# Altium PCB Main.PcbDoc
Units mm, origin at the board's own origin, x right, y up, seen from the top; angles counter-clockwise.
Board outline 56.94 x 65.73 mm, 2 copper layers (Top Layer, Bottom Layer); 32 components, 21 nets, 124 pads, 6 vias.
Unrouted connection lines stored in the file: 25.
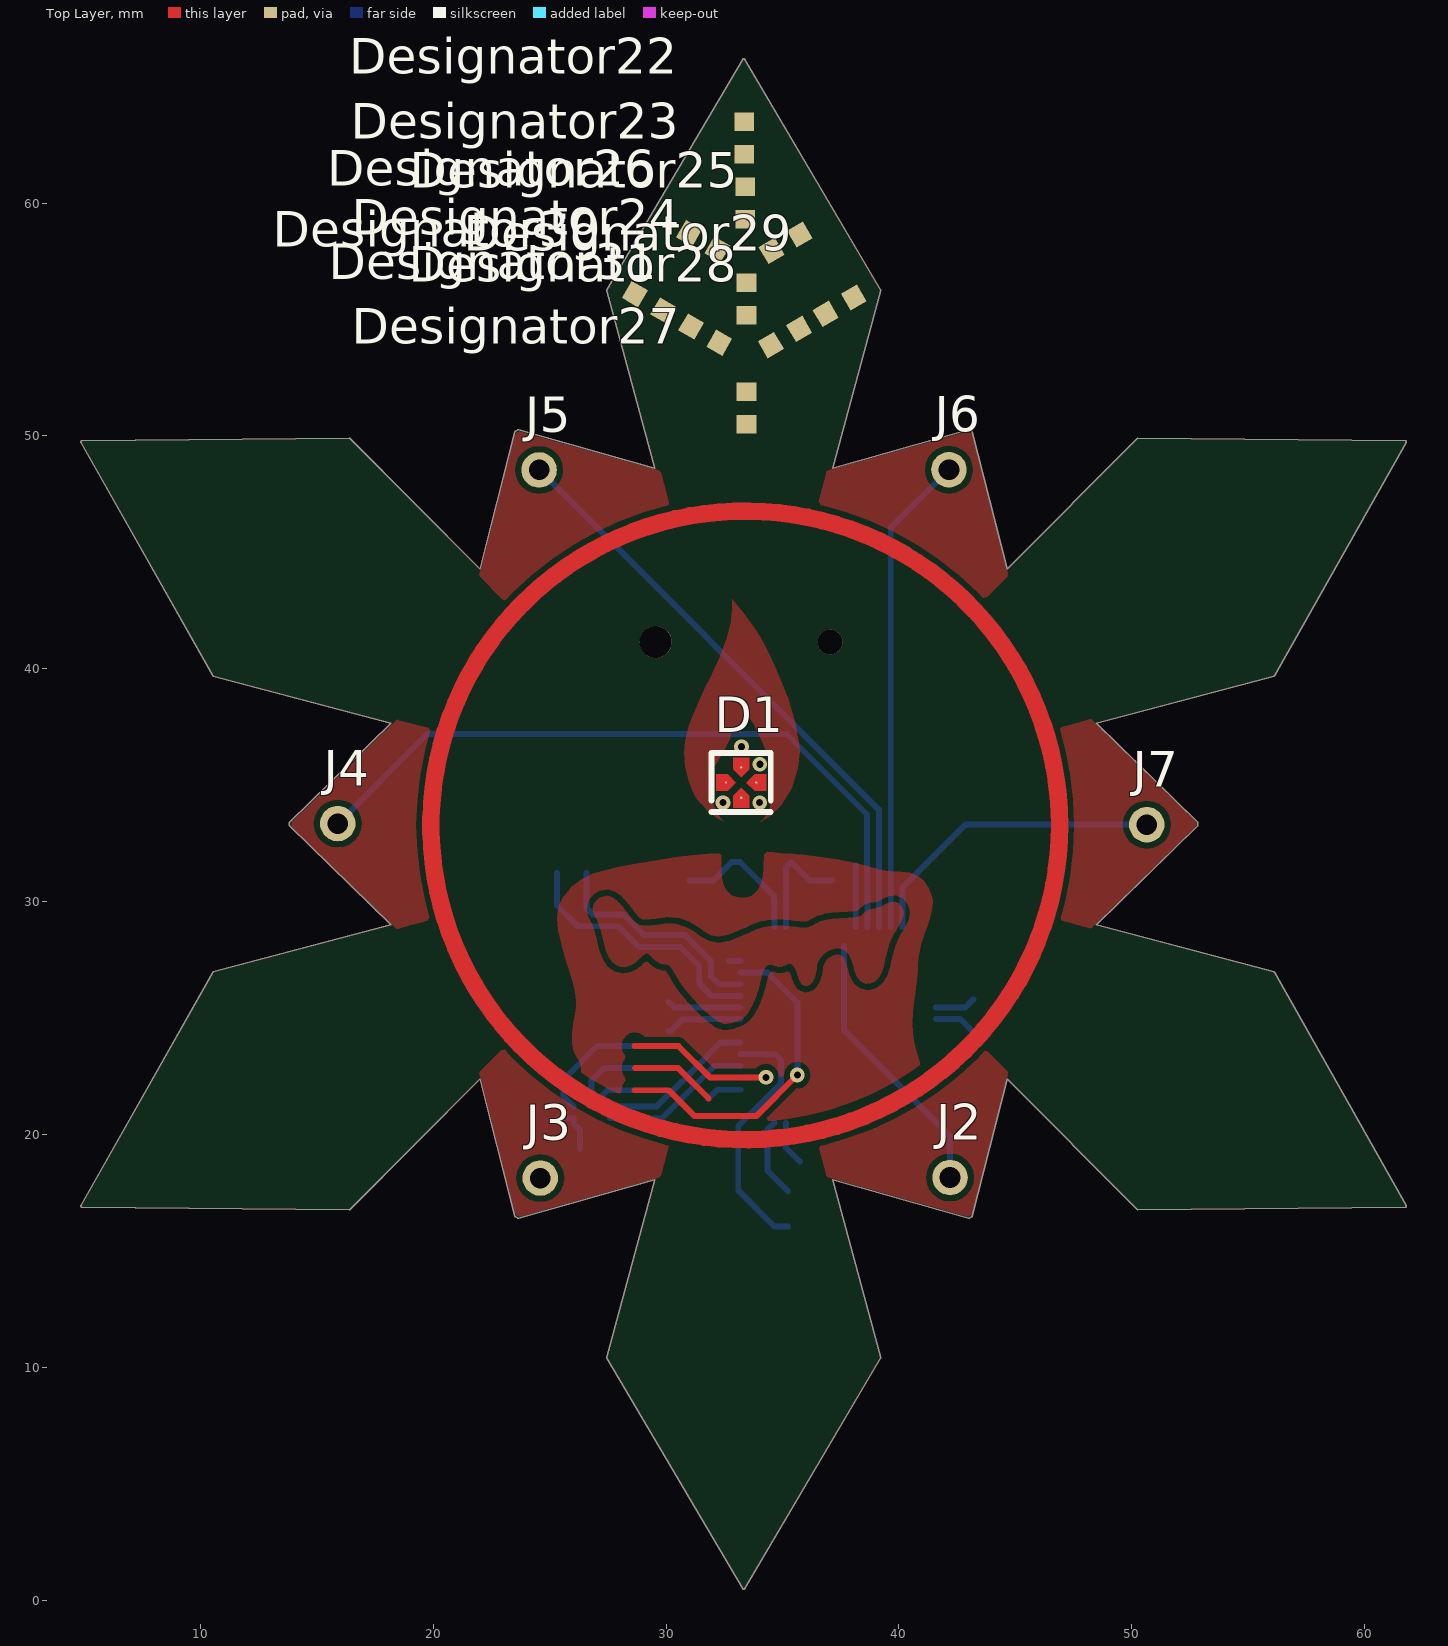
[diagram p0: Top Layer view]
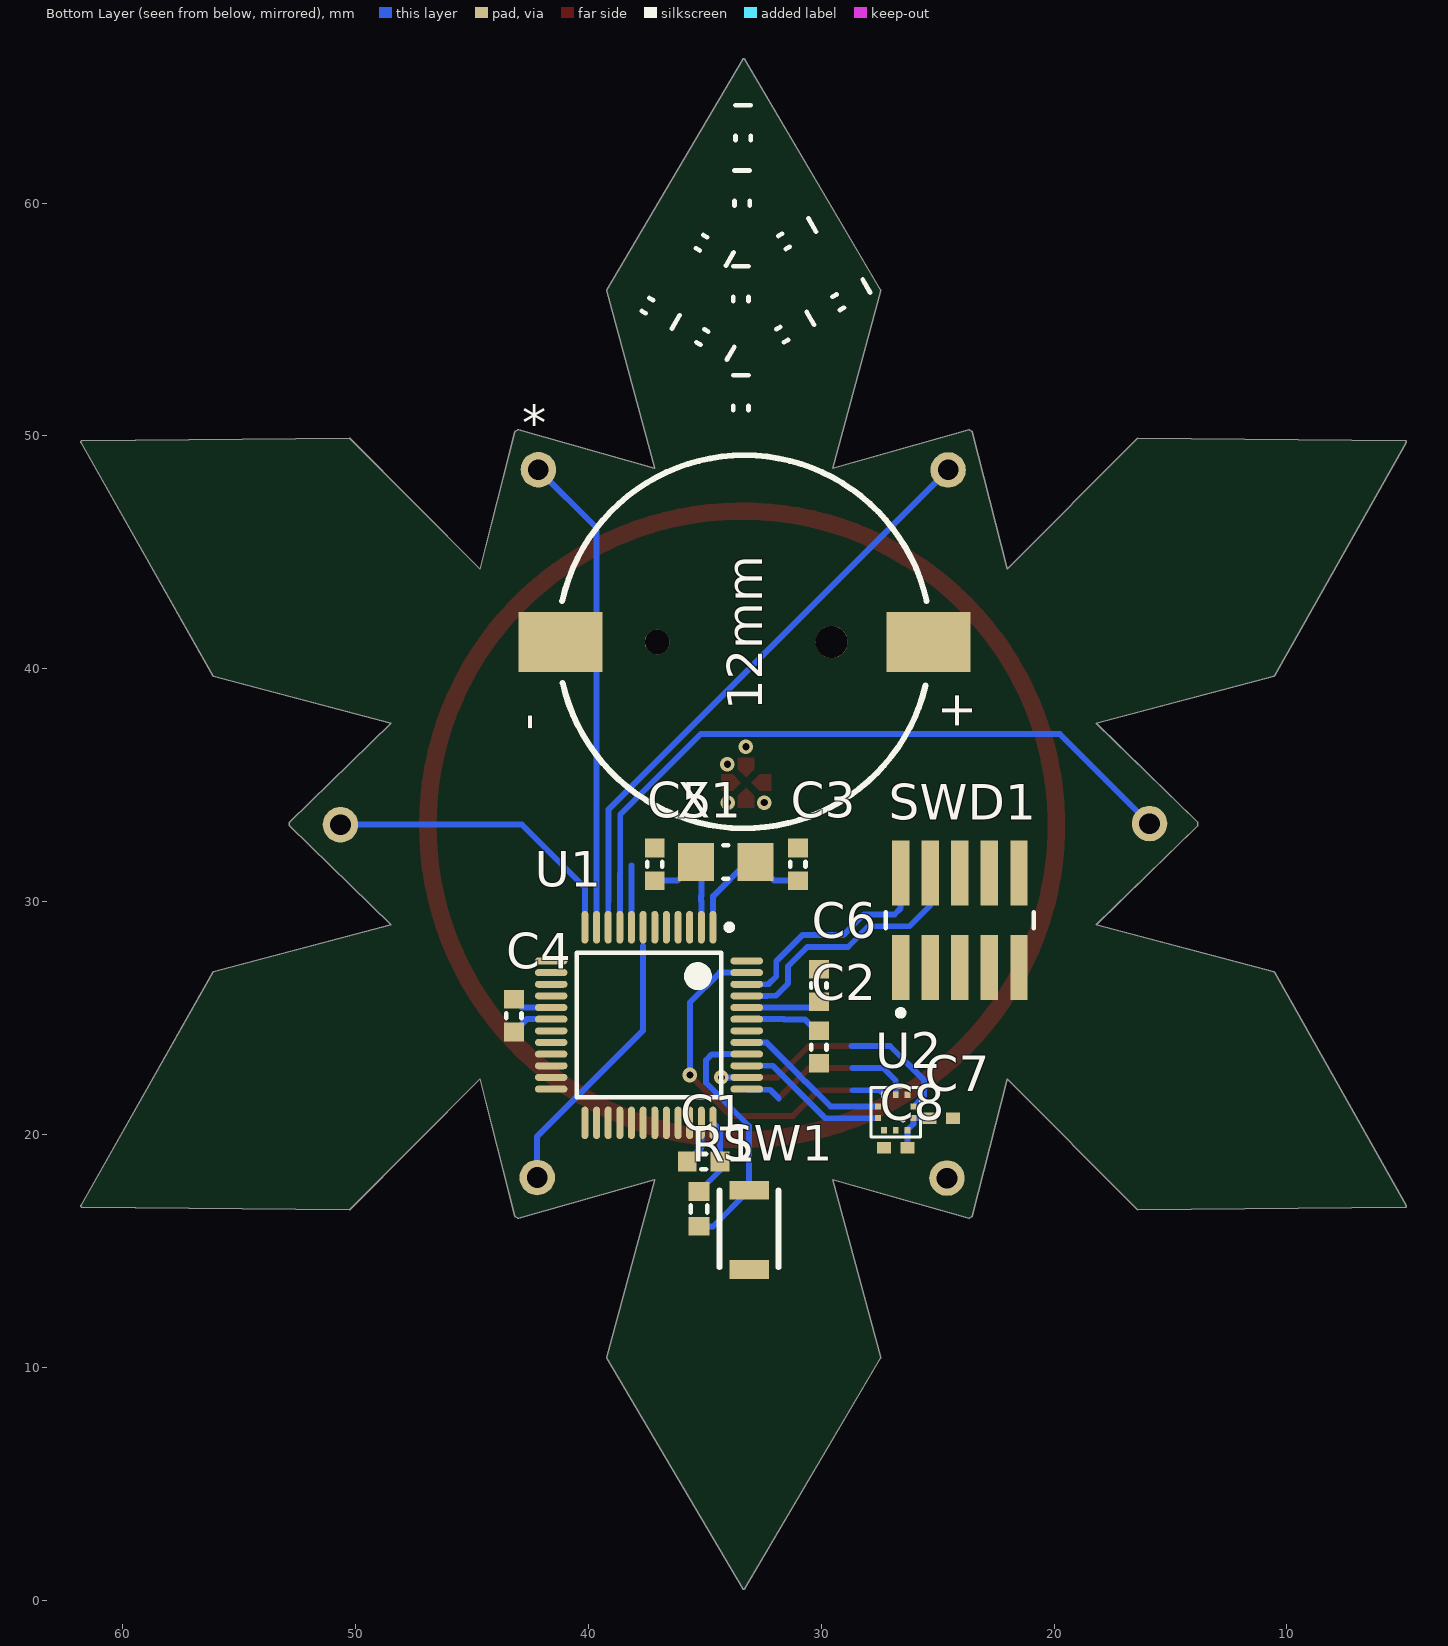
[diagram p1: Bottom Layer view, seen from below]
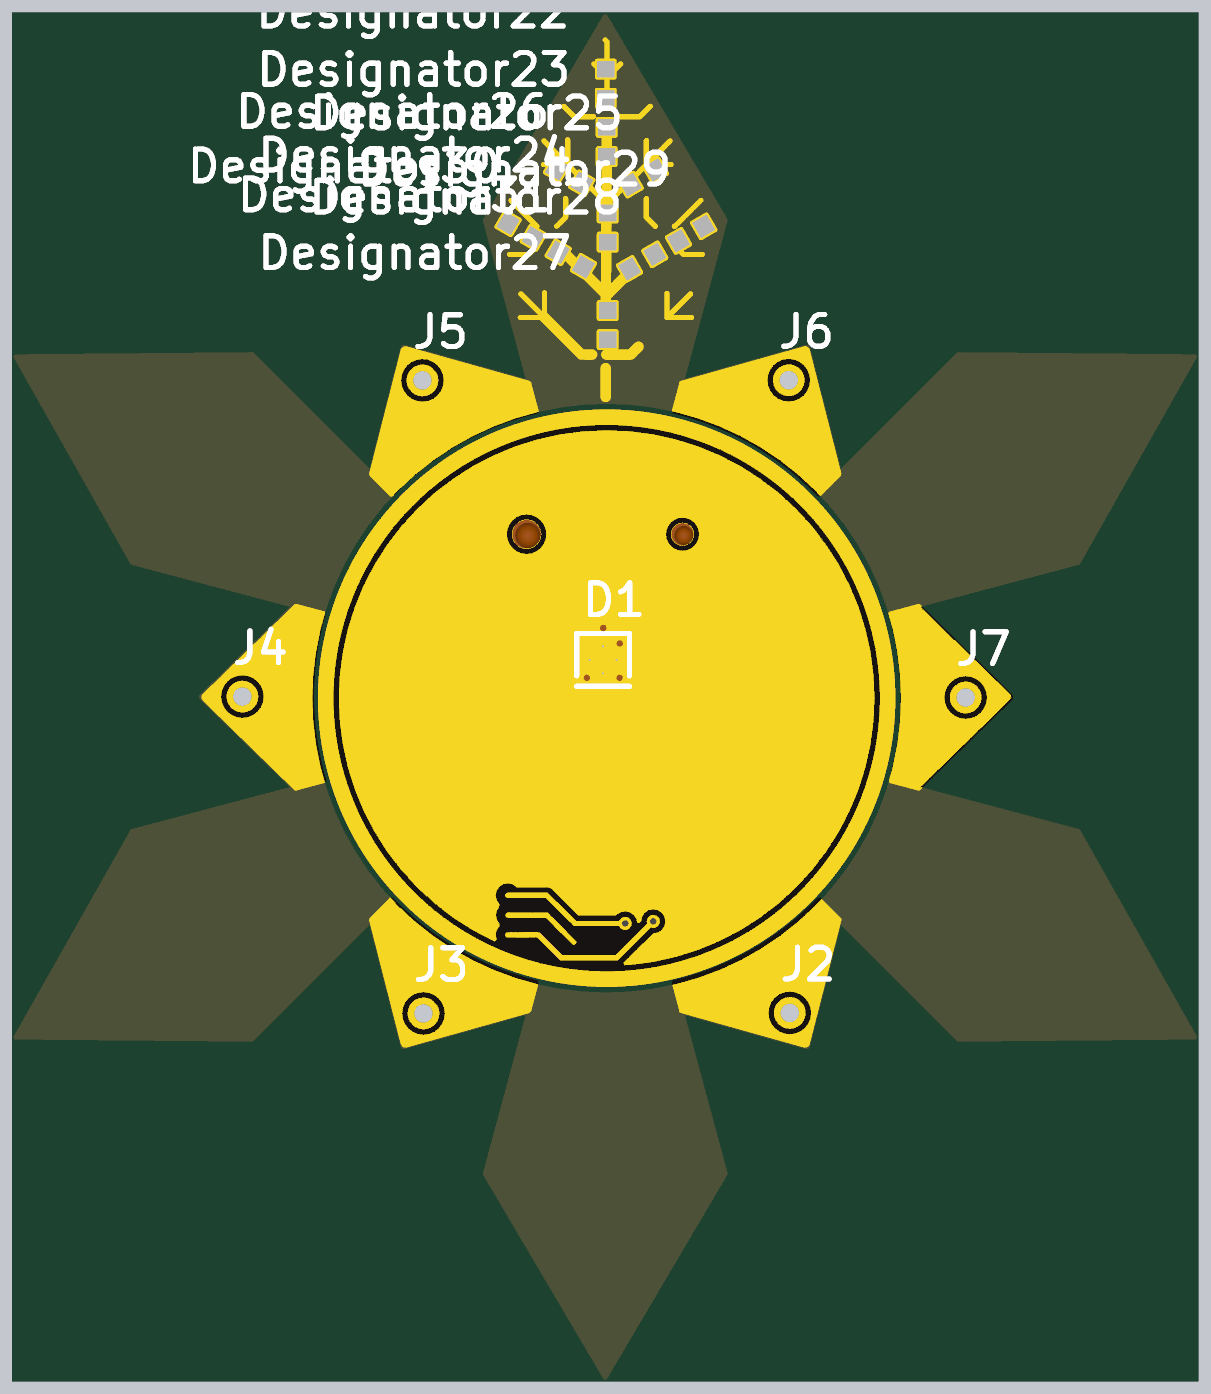
[diagram p2: 3D render of the assembled board from above, using the file's embedded part models]
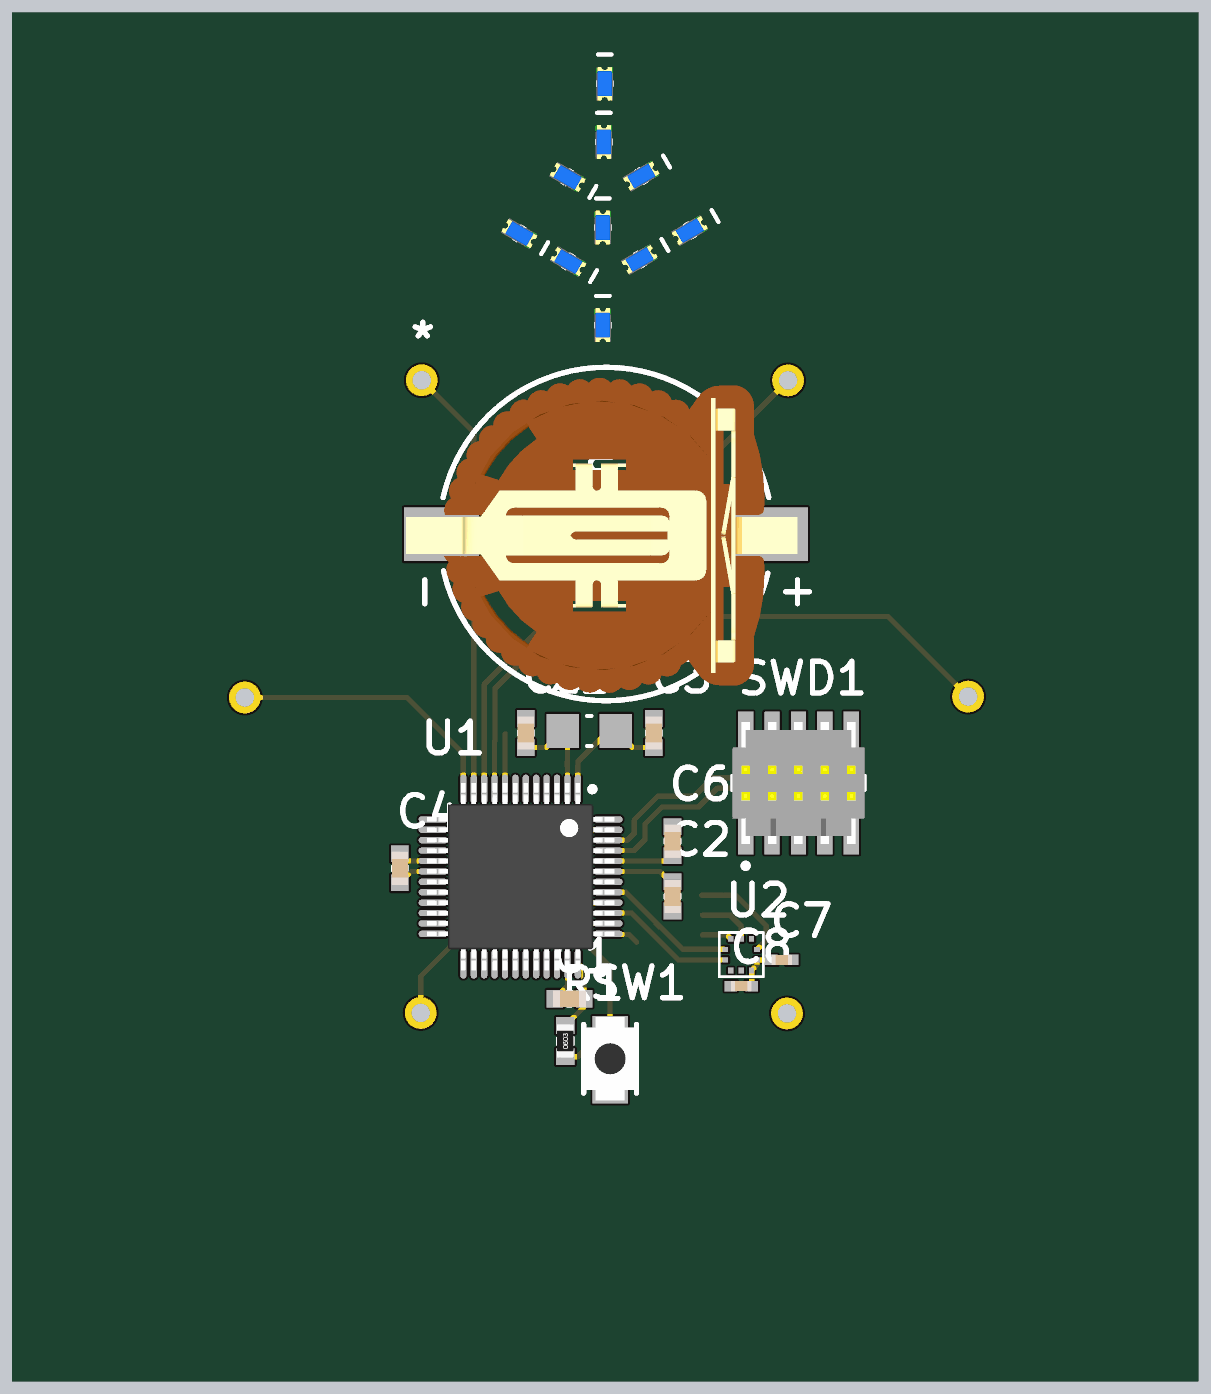
[diagram p3: 3D render of the assembled board from below, using the file's embedded part models]

## Layer stack, top to bottom
Top Solder: solder mask 0.0102, Solder Resist, Dk 3.5
Top Layer: signal copper 0.0356
Dielectric 1: dielectric 0.32, FR-4, Dk 4.8
Bottom Layer: signal copper 0.0356
Bottom Solder: solder mask 0.0102, Solder Resist, Dk 3.5

## Board outline
4.917,16.875 16.403,16.77 ccw(c16.404,16.823) 16.403,16.77 ccw(c16.404,16.823) 16.441,16.786 22.01,22.379 23.512,16.493 ccw(c23.563,16.506) 23.537,16.461 23.62,16.413 ccw(c23.646,16.458) 23.66,16.408 29.509,18.05 27.449,10.43 ccw(c27.5,10.417) 27.455,10.39 33.288,0.494 ccw(c33.333,0.521) 33.378,0.494 39.212,10.39 ccw(c39.167,10.417) 39.219,10.417 ccw(c39.167,10.417) 39.217,10.43 37.158,18.05 43.006,16.408 ccw(c43.021,16.458) 43.047,16.413 43.13,16.461 ccw(c43.104,16.506) 43.13,16.461 ccw(c43.104,16.506) 43.155,16.493 44.657,22.379 50.226,16.786 ccw(c50.263,16.823) 50.264,16.77 61.75,16.875 ccw(c61.75,16.927) 61.75,16.875 ccw(c61.75,16.927) 61.802,16.927 ccw(c61.75,16.927) 61.795,16.953 56.142,26.953 ccw(c56.096,26.927) 56.11,26.978 48.482,29.004 52.828,33.248 ccw(c52.791,33.286) 52.844,33.286 52.844,33.381 ccw(c52.791,33.381) 52.828,33.419 48.482,37.663 56.11,39.689 ccw(c56.096,39.74) 56.142,39.714 61.795,49.714 ccw(c61.75,49.74) 61.802,49.74 ccw(c61.75,49.74) 61.75,49.792 ccw(c61.75,49.74) 61.75,49.792 50.264,49.896 ccw(c50.263,49.844) 50.263,49.896 50.264,49.896 ccw(c50.263,49.844) 50.226,49.881 44.657,44.288 43.155,50.174 ccw(c43.104,50.161) 43.13,50.206 43.047,50.254 ccw(c43.021,50.208) 43.006,50.259 43.007,50.259 43.006,50.259 37.158,48.617 39.217,56.236 ccw(c39.167,56.25) 39.219,56.25 ccw(c39.167,56.25) 39.212,56.277 33.378,66.172 ccw(c33.333,66.146) 33.288,66.172 27.455,56.277 ccw(c27.5,56.25) 27.449,56.236 29.509,48.617 23.66,50.259 ccw(c23.646,50.208) 23.62,50.254 ccw(c23.646,50.208) 23.619,50.254 23.62,50.254 23.619,50.254 23.537,50.206 23.536,50.206 cw(c23.563,50.161) 23.537,50.206 ccw(c23.563,50.161) 23.512,50.174 22.01,44.288 16.441,49.881 ccw(c16.404,49.844) 16.403,49.896 ccw(c16.404,49.844) 16.403,49.896 4.917,49.792 ccw(c4.917,49.74) 4.916,49.792 4.917,49.792 ccw(c4.917,49.74) 4.871,49.714 10.525,39.714 ccw(c10.57,39.74) 10.557,39.689 18.185,37.663 13.839,33.419 ccw(c13.875,33.381) 13.823,33.381 13.823,33.286 ccw(c13.875,33.286) 13.839,33.248 18.185,29.004 10.557,26.978 ccw(c10.57,26.927) 10.525,26.953 4.871,16.953 ccw(c4.917,16.927)

## Design rules (kind name [scope] priority, off if disabled: settings)
Clearance [All] p1: gap=0.254 ignorepadtopadclearanceinfootprint=FALSE except(0: Arc-Hole Track-Hole SMDPad-Hole THPad-Hole Via-Hole Fill-Hole Poly-Hole Region-Hole Text-Hole)
PolygonConnect [All] p1: connectstyle=Relief reliefconductorwidth=0.254 reliefentries=4 polygonreliefangle="90 Angle" airgapwidth=0.254
RoomDefinition Main [InComponentClass('Main')] p1: confinementstyle=ConfineIn formatcopy=TRUE lockcomponents=FALSE outline 62.992,1.905 81.28,1.905 81.28,15.24 62.992,15.24
RoutingVias [All] p1: holewidth=0.711 width=1.27 viastyle="Through Hole" minholewidth=0.711 minwidth=1.27 maxholewidth=0.711 maxwidth=1.27
SolderMaskExpansion [All] p1: expansion=0.102
Width [All] p1: maxlimit=0.254 minlimit=0.254 preferedwidth=0.254
30 further rules are at their usual default settings.

## Classes and differential pairs
component class Main: * C1 C2 C3 C4 C5 C6 C7 C8 D1 J2 J3 J4 J5 J6 J7 R1 SW1 SWD1 U1 U2 X1

## Components (designator, comment, footprint, x,y, rotation, side; value= is the part's Value field where it differs from the comment)
* "KEYSTONE_12MM_COIN_HOLDER_SMT" 12MM_COIN_CELL_SMT 33.3,41.15 r180 bottom
C1 "__template_cap" C0603 35.05,18.836 r180 bottom
C2 "__template_cap" C0603 30.1,23.75 r270 bottom
C3 "__template_cap" C0603 31,31.6 r270 bottom
C4 "__template_cap" C0603 43.2,25.1 r90 bottom
C5 "__template_cap" C0603 37.15,31.6 r270 bottom
C6 "__template_cap" C0603 30.1,26.4 r90 bottom
C7 "399-3520-1-ND" C0402 24.85,20.7 r180 bottom value=1e-07
C8 "399-3520-1-ND" C0402 26.8,19.436 r0 bottom value=1e-07
D1 "LED_CL-503T-SD-T" LED_RGB_CL-503T-SD-T 33.227,35.113 r0 top
Designator22 "Comment" LED_0603P_BLUE 33.358,62.8 r270 top
Designator23 "Comment" LED_0603P_BLUE 33.4,60 r270 top
Designator24 "Comment" LED_0603P_BLUE 33.45,55.885 r270 top
Designator25 "Comment" LED_0603P_BLUE 35.139,58.298 r30 top
Designator26 "Comment" LED_0603P_BLUE 31.6,58.357 r330 top
Designator27 "Comment" LED_0603P_BLUE 33.45,51.2 r270 top
Designator28 "Comment" LED_0603P_BLUE 35.107,54.25 r30 top
Designator29 "Comment" LED_0603P_BLUE 37.458,55.595 r30 top
Designator30 "Comment" LED_0603P_BLUE 29.271,55.74 r330 top
Designator31 "Comment" LED_0603P_BLUE 31.68,54.35 r330 top
J2 "CONN_1x1" CONN_1x1_100MIL 42.2,18.15 r0 top
J3 "CONN_1x1" CONN_1x1_100MIL 24.6,18.125 r0 top
J4 "CONN_1x1" CONN_1x1_100MIL 15.9,33.35 r0 top
J5 "CONN_1x1" CONN_1x1_100MIL 24.55,48.542 r0 top
J6 "CONN_1x1" CONN_1x1_100MIL 42.15,48.55 r0 top
J7 "CONN_1x1" CONN_1x1_100MIL 50.65,33.305 r0 top
R1 "__template_resistor" R0603 35.25,16.8 r90 bottom
SW1 "SWITCH_SPST-NO" SWITCH_B3U-1000P 33.1,17.6 r270 bottom
SWD1 "FTSH-105-01-F-DV-K" SMTC-FTSH-105-01-L-DV-K_V 24.05,29.2 r180 bottom
U1 "SAMD21G18A-A" "SAMD21 TQFP-48" 37.4,24.7 r270 bottom
U2 "BMP388" "8 pin LGA" 26.8,20.95 r270 bottom
X1 "XTAL_9HT10-32.768KEZF-T" XTAL_TXC_9HT10 34.1,31.7 r180 bottom

## Footprints (in the part's own frame and the unit in brackets; to place one, negate y for a bottom-side part, rotate by r counter-clockwise, add the part's x,y. Pads: shape width x height; smd on the part's side, far side on the other; paste and mask are expansions set on the pad)
"8 pin LGA" [mm]
  rect 0.25x0.275 smd: 1(0.25,0.763) 2(-0.25,0.763) 6(-0.25,-0.763) 7(0.25,-0.763)
  rect 0.275x0.25 smd: 3(-0.763,0.5) 4(-0.763,0) 5(-0.763,-0.5) 8(0.763,-0.5) 9(0.763,0) 10(0.763,0.5)
  silkscreen extent -1.06,-1.06 1.06,1.06, body extent -1,-1 1,1, height 0.75
12MM_COIN_CELL_SMT [mil]
  rect 142x102 smd: 0(311,0) 1(-311,0)
  round 42 hole 42.01: 13(-147.5,0)
  round 54 hole 54.02: 14(147.5,0)
  silkscreen extent -308,-315 308,316, body extent -378,-300 362,296, height 170
C0402 [mm] "Chip Capacitor, 2-Leads, Body 1.0x0.5mm, IPC High Density"
  rect 0.6x0.5 smd: 1(-0.5,0) 2(0.5,0)
  body extent -0.5,-0.25 0.5,0.25, height 0.5
C0603 [mm] "Chip Capacitor, 2-Leads, Body 1.6x0.8mm, IPC High Density"
  rect 0.8x0.85 smd: 1(-0.7,0) 2(0.7,0)
  silkscreen extent -0.1,-0.33 0.1,0.33, body extent -0.8,-0.4 0.8,0.4, height 0.8
CONN_1x1_100MIL [mil]
  round 60 hole 35: 1(0,0)
LED_0603P_BLUE [mm]
  rect 0.8x0.85 smd: 1(-0.7,0) 2(0.7,0)
  body extent -0.81,-0.4 0.81,0.4, height 0.6
LED_RGB_CL-503T-SD-T [mm]
  round 0.1 smd: 1(0.651,0) 2(0,-0.651) 3(-0.651,0) 4(0,0.651)
  Top Layer region: 1.076,0.35 0.576,0.35 0.226,0 0.576,-0.35 1.076,-0.35
  Top Layer region: -0.35,1.076 -0.35,0.576 0,0.226 0.35,0.576 0.35,1.076
  Top Layer region: -1.076,-0.35 -0.576,-0.35 -0.226,0 -0.576,0.35 -1.076,0.35
  Top Layer region: 0.35,-1.076 0.35,-0.576 0,-0.226 -0.35,-0.576 -0.35,-1.076
  silkscreen extent -1.27,-1.27 1.27,1.27, body extent -0.65,-0.76 0.65,0.76, height 0.35
R0603 [mm] "Chip Resistor, 2-Leads, Body 1.6x0.8mm, IPC High Density"
  rect 0.8x0.9 smd: 1(-0.75,0) 2(0.75,0)
  silkscreen extent -0.15,-0.35 0.15,0.35, body extent -0.8,-0.4 0.8,0.4, height 0.45
"SAMD21 TQFP-48" [mm] "TQFP-48, Body 7.00x7.00mm, Pitch 0.50mm, IPC Medium Density"
  oval 1.4x0.3 smd: 1(-4.2,2.75) 2(-4.2,2.25) 3(-4.2,1.75) 4(-4.2,1.25) 5(-4.2,0.75) 6(-4.2,0.25) 7(-4.2,-0.25) 8(-4.2,-0.75) 9(-4.2,-1.25) 10(-4.2,-1.75) 11(-4.2,-2.25) 12(-4.2,-2.75) 25(4.2,-2.75) 26(4.2,-2.25) 27(4.2,-1.75) 28(4.2,-1.25) 29(4.2,-0.75) 30(4.2,-0.25) 31(4.2,0.25) 32(4.2,0.75) 33(4.2,1.25) 34(4.2,1.75) 35(4.2,2.25) 36(4.2,2.75)
  oval 0.3x1.4 smd: 13(-2.75,-4.2) 14(-2.25,-4.2) 15(-1.75,-4.2) 16(-1.25,-4.2) 17(-0.75,-4.2) 18(-0.25,-4.2) 19(0.25,-4.2) 20(0.75,-4.2) 21(1.25,-4.2) 22(1.75,-4.2) 23(2.25,-4.2) 24(2.75,-4.2) 37(2.75,4.2) 38(2.25,4.2) 39(1.75,4.2) 40(1.25,4.2) 41(0.75,4.2) 42(0.25,4.2) 43(-0.25,4.2) 44(-0.75,4.2) 45(-1.25,4.2) 46(-1.75,4.2) 47(-2.25,4.2) 48(-2.75,4.2)
  silkscreen extent -4.32,-3.1 3.1,3.57, body extent -4.5,-4.5 4.5,4.5, height 1.2
SMTC-FTSH-105-01-L-DV-K_V [mm] "CONN, 10-Leads, Body 6.35x3.43mm, Pitch 1.27mm"
  rect 0.74x2.79 smd: 1(-2.54,-2.035) 2(-2.54,2.035) 3(-1.27,-2.035) 4(-1.27,2.035) 5(0,-2.035) 6(0,2.035) 7(1.27,-2.035) 8(1.27,2.035) 9(2.54,-2.035) 10(2.54,2.035)
  silkscreen extent -3.17,-4.1 3.17,0.34, body extent -3.17,-2.92 3.18,2.92, height 6.12
SWITCH_B3U-1000P [mm]
  rect 0.8x1.7 smd: 1(0,0) 2(3.4,0)
  silkscreen extent 0,-1.27 3.3,1.27, body extent -0.35,-1.25 3.65,1.25, height 1.6
XTAL_TXC_9HT10 [mm] "Chip Capacitor, 2-Leads, Body 3.2x1.5mm, IPC Medium Density"
  rect 1.55x1.65 smd: 1(-1.275,0) 2(1.275,0)
  silkscreen extent -0.1,-0.72 0.1,0.72, body extent -1.65,-0.8 1.65,0.8, height 0.85

## Part data
*: Manufacturer="Keystone Electronics", Manufacturer Part Number=1056TR, Operating Temperature=-, Supplier Part Number 1=36-1056DKR-ND, Battery Cell Size="Coin, 12.5mm", Battery Series=1220, Battery Type, Function="Coin Cell, Holder", Category="Battery Products", ComponentLink1Description=http://www.keyelco.com/product-pdf.cfm?p=715, ComponentLink1URL=http://www.keyelco.com/product-pdf.cfm?p=715, Height Above Board="0.157\" (4.00mm)", Mounting Type="PCB, Surface Mount", Number of Cells=1, Part Status=Active, Pricing 1="1=2.28, 10=2.071, 50=1.8598, 100=1.7752, 250=1.60616 (USD)", RoHS="RoHS Compliant", Stock 1=1443, Style="Holder (Open)", Supplier 1=Digi-Key, Termination Style="SMD (SMT) Tab"
C1 C4 C6: library part "CAP CER 0603 0.1µF X7R 50V 10%", Capacitance (shorthand)=0.1µF, Capacitance - pF (Machine readable)=100000, Dielectric=X7R, Manufacturer="Murata Electronics North America", Supplier Part Number 1=478-5052-1-ND, Supplier 1=Digikey, Supplier 2=Digi-Key, Supplier Part Number 2=490-8020-1-ND, type=capacitor
C2: library part "CAP CER 0603 1µF X7R 16V 10%", Capacitance (shorthand)=1µF, Capacitance - pF (Machine readable)=1000000, Dielectric=X7R, Manufacturer="Murata Electronics North America", Supplier Part Number 1=490-10479-1-ND, Supplier 1=Digi-Key, type=Capacitor
C3 C5: library part "CAP CER 22PF 50V C0G/NP0 0603", Capacitance (shorthand)=22pF, Supplier Part Number 1=478-5771-1-ND, Supplier 1=Digi-Key
C7 C8: human_value=100n, package=0402, tolerance=10%, voltage=10.0, price=0.06, Supplier Part Number 1=399-3520-1-ND, type=capacitor
D1: "RGB LOW VOLTAGE RICOLOR TOP FIRING 1.5 X 1.3 X", Color="Red, Green, Blue (RGB)", Current - Test="5mA Red, 5mA Green, 5mA Blue", Lens Color=-, Manufacturer=Citizen, Manufacturer Part Number=CL-503T-SD-T, Millicandela Rating="36mcd Red, 180mcd Green, 40mcd Blue", Package / Case="4-SMD, No Lead", Supplier Part Number 1=1642-1509-2-ND, Voltage - Forward (Vf) (Typ)="1.85V Red, 2.7V Green, 2.75V Blue", Category=Optoelectronics, ComponentLink1Description=http://ce.citizen.co.jp/up_img/product/KF9Gun57LXzH/CL-503_e.pdf, ComponentLink1URL=http://ce.citizen.co.jp/up_img/product/KF9Gun57LXzH/CL-503_e.pdf, Configuration="Common Anode", Features=-, Height (Max)=0.35mm, Lens Style/Size="Rectangle with Flat Top, 1.30mm x 1.50mm", Lens Transparency=-, Mounting Type="Surface Mount", Packaging="Tape & Reel (TR)", Part Status=Active, Pricing 1="5000=0.2318, 10000=0.22836, 25000=0.22321 (USD)", RoHS="RoHS Compliant", Size / Dimension="1.50mm L x 1.30mm W", Stock 1=15000, Supplier 1=Digi-Key, Supplier Device Package=-, Viewing Angle=-, Wavelength - Dominant=-, Wavelength - Peak="618nm Red, 530nm Green, 470nm Blue"
J2 J3 J4 J5 J6 J7: "Just a hole, lol"
R1: library part "RES SMD 10K OHM 1% 1/10W 0603", Manufacturer=Yageo, Manufacturer Part Number=RC0603FR-0710KL, Operating Temperature="-55°C ~ 155°C", Power (Watts)="0.1W, 1/10W", Resistance="10 k?", Resistance (Sortable)=10000, Supplier Part Number 1=541-1784-1-ND, Temperature Coefficient=±100ppm/°C, tolerance=±1%, Datasheets=http://www.yageo.com/documents/recent/PYu-RC_Group_51_RoHS_L_9.pdf, Image=//media.digikey.com/Renders/Yageo%20Renders/0603-(1608-Metric).jpg, Supplier 1=Digikey
SW1: "SWITCH TACTILE SPST-NO 0.05A 12V", Contact Rating @ Voltage="0.05A @ 12VDC", Illumination Type, Color=-, Manufacturer="Omron Electronics Inc-EMC Div", Manufacturer Part Number=B3U-1000P, Operating Force=153gf, Operating Temperature="-25°C ~ 70°C", Supplier Part Number 1=SW1020CT-ND, Actuator Height off PCB, from Pins=1.60mm, Actuator Material=-, Actuator Orientation="Top Actuated", Actuator Type=Standard, Category=Switches, Circuit=SPST-NO, ComponentLink1Description=http://components.omron.com/components/web/pdflib.nsf/0/2DD3893C7DD33E9E862572900079E9D6/$file/B3U_1110.pdf, ComponentLink1URL=http://components.omron.com/components/web/pdflib.nsf/0/2DD3893C7DD33E9E862572900079E9D6/$file/B3U_1110.pdf, Features=-, Illumination=Non-Illuminated, Illumination Voltage (Nominal)=-, Ingress Protection="Dust Proof", Mechanical Life="200,000 Cycles", Mounting Type="Surface Mount", Outline="3.00mm x 2.50mm", Packaging="Cut Tape (CT)", Pricing 1="1=1.25, 10=1.201, 25=1.1332, 50=0.997, 100=0.9064, 250=0.86108, 500=0.83842, 1000=0.65714 (USD)", RoHS="RoHS Compliant", Stock 1=16437, Supplier 1=Digi-Key, Switch Function=Off-Mom, Switch Travel=0.15mm, Termination Style="SMD (SMT) Tab"
SWD1: library part FTSH-105-01-L-DV-K, "Male Header, Pitch 1.27 mm, 2 x 5 Position, Height 6.12 mm, RoHS, Tube", Color=Black, Manufacturer=Samtec, Package Description="Male Header, Pitch 1.27 mm, 2 x 5 Position, Height 5.97 mm, Tail Length 4.32 mm", Supplier Part Number 1=SAM8796-ND, Category=Connectors,Interconnects, Connector Type=Header,Shrouded, Contact Finish=Gold, Contact Finish Thickness=3µin(0.08µm), Contact Mating Length="0.120\"(3.05mm)", Contact Type=MalePin, Datasheet URL=http://suddendocs.samtec.com/prints/ftsh-1xx-xx-xxx-dv-xxx-mkt.pdf, Datasheet Version="Rev. ET, 10/1995", Family=RectangularConnectors-Headers,MalePins, Fastening Type=-, Features=-, Manufacturer URL=http://www.samtec.com/, Mounting Type=SurfaceMount, Number of Positions=10, Number of Positions Loaded=All, Number of Rows=2, Package Reference=FTSH-105-01-L-DV-K, Package URL=http://suddendocs.samtec.com/prints/ftsh-1xx-xx-xxx-dv-xxx-footprint.pdf, Packaging=Tube, Pitch="0.050\"(1.27mm)", Row Spacing="0.050\"(1.27mm)", Series=FTSH, Supplier 1=Digi-Key, Supplier 2=Digi-Key, Supplier 3=Samtec, Supplier Part Number 2=FTSH-105-01-F-DV-K-ND, Supplier Part Number 3=FTSH-105-01-F-DV-K, Termination=Solder
U1: "48Mhz Atmel SAM ARM Cortex M0+", Supplier Part Number 1=ATSAMD21G18A-AU-ND, ComponentLink1Description="Product Page", ComponentLink1URL=https://www.microchip.com/wwwproducts/en/ATSAMD21G18, ComponentLink2Description=Datasheet, ComponentLink2URL=http://ww1.microchip.com/downloads/en/DeviceDoc/SAM-D21-Family-Datasheet-DS40001882C.pdf, Supplier 1=Digi-Key
U2: "Pressure Sensor 4.35 PSI ~ 18.13 PSI (30 kPa ~ 125 kPa) Absolute 10-WFLGA", Manufacturer="Bosch Sensortec", Supplier Part Number 1=828-1079-1-ND, ComponentLink1Description=https://ae-bst.resource.bosch.com/media/_tech/media/product_flyer/BST-BMP388-FL000-00.pdf, ComponentLink1URL=https://ae-bst.resource.bosch.com/media/_tech/media/product_flyer/BST-BMP388-FL000-00.pdf, Manufacturer Part Number=BMP388, Pricing 1="1=3.93, 5=3.466, 10=3.061, 25=2.4832, 50=2.1946, 100=2.1368, 500=1.7903, 1000=1.6748, 5000=1.5593 (USD)", Stock 1=46050, Supplier 1=Digi-Key
X1: "CRYSTAL 32.768 KHZ 12.5 PF SMD", ESR (Equivalent Series Resistance)="70 kOhm", Frequency=32.768kHz, Frequency Stability=-, Frequency Tolerance=±10ppm, Load Capacitance=12.5pF, Manufacturer="TXC CORPORATION", Manufacturer Part Number=9HT10-32.768KEZF-T, Operating Mode=Fundamental, Operating Temperature="-40°C ~ 85°C", Package / Case=2-SMD, Supplier Part Number 1=887-1507-1-ND, Category="Crystals and Oscillators", ComponentLink1Description=Datasheet, ComponentLink1URL=http://www.txccrystal.com/images/pdf/9ht10.pdf, Height="0.033\" (0.85mm)", Mounting Type="Surface Mount", Packaging="Cut Tape (CT)", Pricing 1="1=1.88, 10=1.625, 50=1.425, 100=1.125, 500=0.95, 1000=0.75 (USD)", Ratings=-, RoHS="RoHS Compliant", Size / Dimension="0.126\" L x 0.059\" W (3.20mm x 1.50mm)", Stock 1=5250, Supplier 1=Digi-Key, type="kHz Crystal (Tuning Fork)"

## Via types
v1: diameter 0.63, hole 0.305, Top Layer to Bottom Layer, tented both sides, 6 vias

## Nets (pads, with @x,y where several pads share a name; then routed paths per layer and width w, separated by ;. In a path a pad name is that pad's centre, name@x,y a point inside that pad or via, vN(x,y) a via of type N, cw(c..) or ccw(c..) an arc to the next point about the centre after c; other vN are vias at no path point)
+3.3: *.1 C1.2 C4.2 C6.1 C7.1 C8.1 R1.2 U1.17 U1.36 U1.44 U2.1 U2.10 | length 10.5
  Bottom Layer w0.254: C7.1 25.35,20.694 U2.1@26.037,20.694 ; U2.1 U2.1@26.037,20.694 ; C8.1@26.3,19.4 U2.10 26.037,20.45 U2.1@26.037,20.694 ; C6.1 30.35,25.45 32.25,25.45 U1.44 ; U1.36 34.35,20.2 C1.2 34.35,18.45 R1.2 ; U1.17 42.85,25.45 C4.2
BMP388-Int: U1.39 U2.7 | length 6.5
  Bottom Layer w0.254: U2.7@27.595,20.694 29.826,20.694 32.082,22.95 U1.39
BMP388-Select: U1.41 U2.6 | length 6.7
  Bottom Layer w0.254: U2.6@27.595,21.206 29.606,21.206 30.669,22.269 30.683,22.269 30.906,22.492 30.906,22.506 32.342,23.942 32.35,23.942 ; 32.35,23.95 U1.41
GND: *.0 C1.1 C2.2 C3.1 C4.1 C5.1 C6.2 C7.2 C8.2 SW1.2 SWD1.3 SWD1.5 SWD1.9 U1.18 U1.35 U1.42 U2.3 U2.8 U2.9 | length 3.8
  Bottom Layer w0.254: U1.35 35.15,19.474 35.131,19.455 C1.1 ; U1.18 42.65,24.95 C4.1
MISO: U1.47 U2.5 | length 15.7
  Top Layer w0.254: 28.65,21.9 30.115,21.9 31.215,20.8 33.891,20.8 v1(35.641,22.55)
  Bottom Layer w0.254: U2.5 27.487,21.9 28.65,21.9 ; U1.47 34.362,26.95 35.641,25.671 v1(35.641,22.55)
MOSI: U1.37 U2.4 | length 7.9
  Top Layer w0.254: 28.663,22.85 30.526,22.85 31.826,21.55
  Bottom Layer w0.254: U2.4 26.8,22.32 27.33,22.85 28.663,22.85 ; 31.826,21.55 32.195,21.919 U1.37@33.2,21.919
NetC3_2: C3.2 U1.1 X1.2 | length 5.9
  Bottom Layer w0.254: C3.2 32.025,30.9 X1.2 33.175,31.7 34.642,30.233 34.642,30.025 ; U1.1 34.65,30.025
NetC5_2: C5.2 U1.2 X1.1 | length 5
  Bottom Layer w0.254: U1.2 35.15,30.025 ; 35.158,30.025 35.158,30.235 35.15,30.243 35.15,31.475 X1.1 36.175,30.9 C5.2
NetR1_1: R1.1 SW1.1 U1.40 | length 11
  Bottom Layer w0.254: U1.40 34.3,23.45 ; 34.25,23.442 34.698,23.442 34.945,23.194 34.945,22.207 33.1,20.362 SW1.1 34.65,16.05 R1.1
RST: SWD1.10
SCK: U1.38 U2.2 | length 12.3
  Top Layer w0.254: 28.65,23.8 30.53,23.8 31.88,22.45 v1(34.29,22.45)
  Bottom Layer w0.254: U2.2 25.594,21.643 25.594,22.344 27.05,23.8 28.65,23.8 28.7,23.8 ; U1.38 v1(34.29,22.45)
SWCLK: SWD1.4 U1.45 | length 11.3
  Bottom Layer w0.254: SWD1.4 25.32,29.83 26.209,28.941 27.958,28.941 28.849,28.05 30.6,28.05 31.425,27.225 31.425,26.475 31.942,25.958 32.33,25.958 ; 32.33,25.95 U1.45
SWDIO: SWD1.2 U1.46 | length 9.9
  Bottom Layer w0.254: SWD1.2 26.59,29.71 26.851,29.449 28.168,29.449 29.059,28.558 30.81,28.558 31.933,27.435 31.933,26.785 32.252,26.466 32.268,26.466 ; 32.268,26.45 U1.46
Touch-1: J2.1 U1.7 | length 11.8
  Bottom Layer w0.254: 37.65,28.099 37.65,24.47 42.2,19.92 J2.1
Touch-2: J3.1 U1.8 | length 2.6
  Bottom Layer w0.254: U1.8 38.15,31.55
Touch-3: J4.1 U1.9 | length 30.6
  Bottom Layer w0.254: J4.1 19.75,37.2 35.173,37.2 38.634,33.739 38.634,31.2 ; U1.9 38.65,31.2
Touch-4: J5.1 U1.10 | length 25.7
  Bottom Layer w0.254: J5.1 39.142,33.95 39.142,30.025 ; 39.142,30.017 39.142,30.025 ; U1.10 39.15,30.017 39.142,30.025
Touch-5: J6.1 U1.11 | length 20.7
  Bottom Layer w0.254: U1.11 39.65,46.05 J6.1
Touch-6: J7.1 U1.12 | length 13.3
  Bottom Layer w0.254: U1.12 40.15,30.6 42.855,33.305 J7.1
VCC: SWD1.1
VDDCORE: C2.1 U1.43 | length 3.3
  Bottom Layer w0.254: C2.1 30.214,24.45 30.706,24.942 31.6,24.942 ; 31.6,24.95 U1.43
pads on no net: *.13 *.14 D1.1 D1.2 D1.3 D1.4 Designator22.1 Designator22.2 Designator23.1 Designator23.2 Designator24.1 Designator24.2 Designator25.1 Designator25.2 Designator26.1 Designator26.2 Designator27.1 Designator27.2 Designator28.1 Designator28.2 Designator29.1 Designator29.2 Designator30.1 Designator30.2 Designator31.1 Designator31.2 SWD1.6 SWD1.7 SWD1.8 U1.3 U1.4 U1.5 U1.6 U1.13 U1.14 U1.15 U1.16 U1.19 U1.20 U1.21 U1.22 U1.23 U1.24 U1.25 U1.26 U1.27 U1.28 U1.29 U1.30 U1.31 U1.32 U1.33 U1.34 U1.48
copper on no net: | length 85.3
  Top Layer w0.75: 46.901,33.274 ccw(c33.401,33.274) 46.901,33.274
  Bottom Layer w0.254: 32.692,27.45 33.2,27.45
  other v1: 32.45,34.25 34.022,34.25 34.032,35.9 33.239,36.65

## Polygon pours and split planes (outlines as drawn)
no net on Top Layer "Top Layer-No Net 8" (solid, pour order 22): 326 vertices, not listed, extent 25.331,20.538 41.45,32.139
no net on Top Layer "Top Layer-No Net 2" (solid, pour order 175): 46.8,29.364 cw(c46.923,29.33) 46.8,29.365 46.8,29.364 cw(c46.924,29.333) 46.802,29.372 ccw(c33.247,33.291) 47.357,33.291 ccw(c33.247,33.291) 46.774,37.305 cw(c46.896,37.342) 46.863,37.465 48.147,37.807 cw(c48.225,37.707) 48.314,37.798 52.727,33.489 cw(c52.638,33.398) 52.765,33.398 52.765,33.302 cw(c52.638,33.302) 52.727,33.211 48.329,28.917 cw(c48.224,28.988) 48.191,28.865 46.918,29.203 cw(c46.923,29.33)
no net on Top Layer "Top Layer-No Net 3" (solid, pour order 173): 19.9,37.3 cw(c19.777,37.334) 19.9,37.299 19.9,37.3 cw(c19.776,37.331) 19.898,37.292 ccw(c33.453,33.373) 19.343,33.373 ccw(c33.453,33.373) 19.926,29.359 cw(c19.804,29.322) 19.837,29.199 18.553,28.857 cw(c18.475,28.958) 18.386,28.866 13.973,33.175 cw(c14.062,33.266) 13.935,33.266 13.935,33.362 cw(c14.062,33.362) 13.973,33.453 18.371,37.747 cw(c18.476,37.676) 18.509,37.799 19.782,37.461 cw(c19.777,37.334)
no net on Top Layer "Top Layer-No Net 4" (solid, pour order 171): 43.519,42.991 cw(c43.61,43.08) 43.518,42.992 43.519,42.991 cw(c43.608,43.083) 43.513,42.997 ccw(c33.343,33.217) 40.398,45.437 ccw(c33.343,33.217) 36.629,46.939 cw(c36.659,47.063) 36.536,47.096 36.881,48.38 cw(c37.007,48.397) 36.973,48.519 42.911,50.186 cw(c42.945,50.064) 43.009,50.174 43.091,50.126 cw(c43.028,50.016) 43.151,50.047 44.671,44.092 cw(c44.557,44.036) 44.647,43.947 43.718,43.012 cw(c43.61,43.08)
no net on Top Layer "Top Layer-No Net 5" (solid, pour order 169): 43.519,23.675 ccw(c43.61,23.586) 43.518,23.674 43.519,23.675 ccw(c43.608,23.584) 43.513,23.669 cw(c33.343,33.449) 40.398,21.23 cw(c33.343,33.449) 36.629,19.727 ccw(c36.659,19.603) 36.536,19.57 36.881,18.287 ccw(c37.007,18.27) 36.973,18.147 42.911,16.48 ccw(c42.945,16.603) 43.009,16.493 43.091,16.541 ccw(c43.028,16.651) 43.151,16.619 44.671,22.574 ccw(c44.557,22.63) 44.647,22.72 43.718,23.654 ccw(c43.61,23.586)
no net on Top Layer "Top Layer-No Net 6" (solid, pour order 167): 23.147,23.675 cw(c23.056,23.586) 23.148,23.674 23.147,23.675 cw(c23.058,23.584) 23.153,23.669 ccw(c33.324,33.449) 26.269,21.23 ccw(c33.324,33.449) 30.038,19.727 cw(c30.008,19.603) 30.131,19.57 29.786,18.287 cw(c29.659,18.27) 29.694,18.147 23.756,16.48 cw(c23.722,16.603) 23.658,16.493 23.575,16.541 cw(c23.639,16.651) 23.515,16.619 21.995,22.574 cw(c22.11,22.63) 22.02,22.72 22.949,23.654 cw(c23.056,23.586)
no net on Top Layer "Top Layer-No Net 7" (solid, pour order 165): 23.147,42.991 ccw(c23.056,43.08) 23.148,42.992 23.147,42.991 ccw(c23.058,43.083) 23.153,42.997 cw(c33.324,33.217) 26.269,45.437 cw(c33.324,33.217) 30.038,46.939 ccw(c30.008,47.063) 30.131,47.096 29.786,48.38 ccw(c29.659,48.397) 29.694,48.519 23.756,50.186 ccw(c23.722,50.064) 23.658,50.174 23.575,50.126 ccw(c23.639,50.016) 23.516,50.047 21.996,44.092 ccw(c22.11,44.036) 22.02,43.947 22.949,43.012 ccw(c23.056,43.08)
no net on Top Layer "Top Layer-No Net 1" (solid, pour order 10): 646 vertices, not listed, extent 26.86,24.755 40.201,30.256
no net on Top Layer "Top Layer-No Net" (solid, pour order 4): 265 vertices, not listed, extent 30.791,33.425 35.733,42.996
no net on Top Layer "GND" (solid, shelved, pour order 2): 4.917,16.875 16.403,16.77 ccw(c16.404,16.823) 16.403,16.77 ccw(c16.404,16.823) 16.441,16.786 22.01,22.379 23.512,16.493 ccw(c23.563,16.506) 23.537,16.461 23.62,16.413 ccw(c23.646,16.458) 23.66,16.408 29.509,18.05 27.449,10.43 ccw(c27.5,10.417) 27.455,10.39 33.288,0.494 ccw(c33.333,0.521) 33.378,0.494 39.212,10.39 ccw(c39.167,10.417) 39.219,10.417 ccw(c39.167,10.417) 39.217,10.43 37.158,18.05 43.006,16.408 ccw(c43.021,16.458) 43.047,16.413 43.13,16.461 ccw(c43.104,16.506) 43.13,16.461 ccw(c43.104,16.506) 43.155,16.493 44.657,22.379 50.226,16.786 ccw(c50.263,16.823) 50.264,16.77 61.75,16.875 ccw(c61.75,16.927) 61.75,16.875 ccw(c61.75,16.927) 61.802,16.927 ccw(c61.75,16.927) 61.795,16.953 56.142,26.953 ccw(c56.096,26.927) 56.11,26.978 48.482,29.004 52.828,33.248 ccw(c52.791,33.286) 52.844,33.286 52.844,33.381 ccw(c52.791,33.381) 52.828,33.419 48.482,37.663 56.11,39.689 ccw(c56.096,39.74) 56.142,39.714 61.795,49.714 ccw(c61.75,49.74) 61.802,49.74 ccw(c61.75,49.74) 61.75,49.792 ccw(c61.75,49.74) 61.75,49.792 50.264,49.896 ccw(c50.263,49.844) 50.263,49.896 50.264,49.896 ccw(c50.263,49.844) 50.226,49.881 44.657,44.288 43.155,50.174 ccw(c43.104,50.161) 43.13,50.206 43.047,50.254 ccw(c43.021,50.208) 43.006,50.259 43.007,50.259 43.006,50.259 37.158,48.617 39.217,56.236 ccw(c39.167,56.25) 39.219,56.25 ccw(c39.167,56.25) 39.212,56.277 33.378,66.172 ccw(c33.333,66.146) 33.288,66.172 27.455,56.277 ccw(c27.5,56.25) 27.449,56.236 29.509,48.617 23.66,50.259 ccw(c23.646,50.208) 23.62,50.254 ccw(c23.646,50.208) 23.619,50.254 23.62,50.254 23.619,50.254 23.537,50.206 23.536,50.206 cw(c23.563,50.161) 23.537,50.206 ccw(c23.563,50.161) 23.512,50.174 22.01,44.288 16.441,49.881 ccw(c16.404,49.844) 16.403,49.896 ccw(c16.404,49.844) 16.403,49.896 4.917,49.792 ccw(c4.917,49.74) 4.916,49.792 4.917,49.792 ccw(c4.917,49.74) 4.871,49.714 10.525,39.714 ccw(c10.57,39.74) 10.557,39.689 18.185,37.663 13.839,33.419 ccw(c13.875,33.381) 13.823,33.381 13.823,33.286 ccw(c13.875,33.286) 13.839,33.248 18.185,29.004 10.557,26.978 ccw(c10.57,26.927) 10.525,26.953 4.871,16.953 ccw(c4.917,16.927)
no net on Top Solder "Top Solder-No Net" (solid, pour order 145): 46.962,29.339 cw(c47.084,29.305) 46.962,29.34 46.962,29.339 cw(c47.085,29.308) 46.964,29.347 ccw(c33.409,33.266) 47.519,33.266 ccw(c33.409,33.266) 46.936,37.28 cw(c47.058,37.317) 47.025,37.44 48.309,37.782 cw(c48.387,37.682) 48.476,37.773 52.888,33.464 cw(c52.799,33.373) 52.927,33.373 52.927,33.277 cw(c52.799,33.277) 52.888,33.186 48.491,28.892 cw(c48.385,28.963) 48.353,28.84 47.079,29.178 cw(c47.084,29.305)
no net on Top Solder "Top Solder-No Net" (solid, pour order 159): 43.519,23.675 ccw(c43.61,23.586) 43.518,23.674 43.519,23.675 ccw(c43.608,23.584) 43.513,23.669 cw(c33.343,33.449) 40.398,21.23 cw(c33.343,33.449) 36.629,19.727 ccw(c36.659,19.603) 36.536,19.57 36.881,18.287 ccw(c37.007,18.27) 36.973,18.147 42.911,16.48 ccw(c42.945,16.603) 43.009,16.493 43.091,16.541 ccw(c43.028,16.651) 43.151,16.619 44.671,22.574 ccw(c44.557,22.63) 44.647,22.72 43.718,23.654 ccw(c43.61,23.586)
no net on Top Solder "Top Solder-No Net" (solid, pour order 161): 23.147,23.675 cw(c23.056,23.586) 23.148,23.674 23.147,23.675 cw(c23.058,23.584) 23.153,23.669 ccw(c33.324,33.449) 26.269,21.23 ccw(c33.324,33.449) 30.038,19.727 cw(c30.008,19.603) 30.131,19.57 29.786,18.287 cw(c29.659,18.27) 29.694,18.147 23.756,16.48 cw(c23.722,16.603) 23.658,16.493 23.575,16.541 cw(c23.639,16.651) 23.515,16.619 21.995,22.574 cw(c22.11,22.63) 22.02,22.72 22.949,23.654 cw(c23.056,23.586)
no net on Top Solder "Top Solder-No Net" (solid, pour order 155): 19.9,37.3 cw(c19.777,37.334) 19.9,37.299 19.9,37.3 cw(c19.776,37.331) 19.898,37.292 ccw(c33.453,33.373) 19.343,33.373 ccw(c33.453,33.373) 19.926,29.359 cw(c19.804,29.322) 19.837,29.199 18.553,28.857 cw(c18.475,28.958) 18.386,28.866 13.973,33.175 cw(c14.062,33.266) 13.935,33.266 13.935,33.362 cw(c14.062,33.362) 13.973,33.453 18.371,37.747 cw(c18.476,37.676) 18.509,37.799 19.782,37.461 cw(c19.777,37.334)
no net on Top Solder "Top Solder-No Net" (solid, pour order 163): 23.147,42.991 ccw(c23.056,43.08) 23.148,42.992 23.147,42.991 ccw(c23.058,43.083) 23.153,42.997 cw(c33.324,33.217) 26.269,45.437 cw(c33.324,33.217) 30.038,46.939 ccw(c30.008,47.063) 30.131,47.096 29.786,48.38 ccw(c29.659,48.397) 29.694,48.519 23.756,50.186 ccw(c23.722,50.064) 23.658,50.174 23.575,50.126 ccw(c23.639,50.016) 23.516,50.047 21.996,44.092 ccw(c22.11,44.036) 22.02,43.947 22.949,43.012 ccw(c23.056,43.08)
no net on Top Solder "Top Solder-No Net" (solid, pour order 157): 43.519,42.991 cw(c43.61,43.08) 43.518,42.992 43.519,42.991 cw(c43.608,43.083) 43.513,42.997 ccw(c33.343,33.217) 40.398,45.437 ccw(c33.343,33.217) 36.629,46.939 cw(c36.659,47.063) 36.536,47.096 36.881,48.38 cw(c37.007,48.397) 36.973,48.519 42.911,50.186 cw(c42.945,50.064) 43.009,50.174 43.091,50.126 cw(c43.028,50.016) 43.151,50.047 44.671,44.092 cw(c44.557,44.036) 44.647,43.947 43.718,43.012 cw(c43.61,43.08)
no net on Top Solder "Top Solder-No Net" (solid, pour order 82): 19.901,33.274 ccw(c33.401,33.274) 33.401,19.774 ccw(c33.401,33.274) 46.901,33.274 ccw(c33.401,33.274) 33.401,46.774 ccw(c33.401,33.274)
no net on Top Solder "Top Solder-No Net" (solid, pour order 18): 33.044,30.743 32.93,30.958 cw(c32.936,30.962) 32.93,30.958 cw(c32.936,30.962) 32.929,30.961 ccw(c32.936,30.962) 32.93,30.958 32.929,30.961 cw(c32.936,30.962) 32.929,30.961 32.877,31.424 cw(c32.884,31.425) 32.877,31.425 ccw(c32.884,31.425) 32.877,31.424 cw(c32.884,31.425) 32.877,31.424 32.877,31.425 cw(c32.884,31.425) 32.877,31.425 32.864,32.021 cw(c32.871,32.021) 32.864,32.021 cw(c32.871,32.021) 32.864,32.021 32.864,32.374 cw(c32.871,32.374) 32.864,32.374 32.869,32.837 cw(c32.876,32.837) 32.869,32.837 32.886,33.234 cw(c32.893,33.233) 32.886,33.234 32.92,33.468 cw(c32.927,33.467) 32.921,33.47 32.956,33.57 cw(c32.962,33.568) 32.957,33.572 33.049,33.697 cw(c33.054,33.694) 33.053,33.7 33.091,33.706 33.223,33.747 cw(c33.225,33.74) 33.226,33.747 33.37,33.724 cw(c33.369,33.717) 33.372,33.723 cw(c33.369,33.717) 33.372,33.723 33.483,33.663 ccw(c33.479,33.657) 33.483,33.663 cw(c33.479,33.657) 33.484,33.662 cw(c33.479,33.657) 33.484,33.662 33.514,33.635 cw(c33.51,33.63) 33.515,33.635 33.536,33.616 cw(c33.531,33.611) 33.537,33.615 33.582,33.537 cw(c33.576,33.533) 33.582,33.536 cw(c33.576,33.533) 33.583,33.534 33.621,33.329 cw(c33.614,33.328) 33.621,33.329 cw(c33.614,33.328) 33.621,33.328 33.638,32.925 cw(c33.631,32.925) 33.638,32.925 33.642,32.407 cw(c33.635,32.407) 33.642,32.407 33.642,32.117 cw(c33.635,32.117) 33.642,32.117 33.639,31.767 ccw(c33.633,31.767) 33.639,31.767 cw(c33.633,31.767) 33.639,31.767 cw(c33.633,31.767) 33.639,31.767 33.631,31.404 ccw(c33.624,31.404) 33.631,31.404 cw(c33.624,31.404) 33.631,31.404 cw(c33.624,31.404) 33.631,31.404 33.612,31.132 ccw(c33.605,31.133) 33.612,31.133 33.612,31.132 cw(c33.605,31.133) 33.612,31.132 cw(c33.605,31.133) 33.612,31.132 33.58,30.939 ccw(c33.573,30.94) 33.58,30.939 cw(c33.573,30.94) 33.58,30.938 33.579,30.938 ccw(c33.573,30.94) 33.58,30.938 33.579,30.938 ccw(c33.573,30.94) 33.58,30.939 33.579,30.938 33.531,30.81 cw(c33.525,30.812) 33.531,30.81 cw(c33.525,30.812) 33.53,30.808 33.461,30.733 cw(c33.456,30.737) 33.459,30.731 cw(c33.456,30.737) 33.459,30.731 33.367,30.695 ccw(c33.364,30.702) 33.367,30.695 cw(c33.364,30.702) 33.365,30.695 33.276,30.686 cw(c33.276,30.692) 33.276,30.686 33.197,30.686 cw(c33.197,30.692) 33.195,30.686 33.048,30.739 cw(c33.05,30.746) 33.047,30.739 cw(c33.05,30.746)

## Silkscreen, mask and mechanical layers (free items; w line width, h text height)
Top Solder:
  circle w0.75: c33.401,33.274 r13.5
  lines w0.254: 28.744,54.596 29.641,54.596 30.07,55.025 ; 28.809,57.19 30.052,55.947 ; 29.253,51.562 30.412,51.562 30.412,52.749 ; 29.277,52.697 32.301,49.673 ; 30.369,58.912 31.528,58.912 31.528,60.099 ; 30.393,60.047 33.417,57.023 ; 31,55.955 31.429,56.384 31.429,57.281 ; 31.335,61.709 31.83,61.214 32.766,61.214 ; 32.787,63.749 33.417,63.119 33.442,63.119 34.073,63.749 ; 33.302,57.023 33.417,57.023 ; 33.333,64.897 33.417,64.813 33.417,61.865 ; 33.353,52.626 33.385,52.626 ; 34.068,61.214 35.004,61.214 35.499,61.709 ; 35.306,57.281 35.306,56.384 35.735,55.955 35.735,55.946 ; 35.306,60.071 35.306,58.912 36.493,58.912 ; 36.295,52.721 36.295,51.562 37.482,51.562 ; 36.324,51.591 37.43,52.697 ; 36.441,60.047 33.417,57.023 ; 36.665,55.025 37.094,54.596 37.991,54.596 ; 37.926,57.19 36.682,55.947 36.655,55.947 ; 36.655,55.946 36.655,55.947
  lines w0.5: 30.412,51.562 32.19,49.784 ; 31.046,54.997 33.401,52.642 ; 32.339,49.784 32.702,49.784 ; 33.353,47.745 33.353,49.133 ; 33.362,51.943 33.409,60.563 ; 33.385,49.784 34.559,49.784 34.933,50.158 ; 33.385,52.626 34.528,53.768
Mechanical 1:
  lines w0.013: 10.57,26.927 18.288,28.977 13.875,33.286 13.875,33.381 18.288,37.69 10.57,39.74 4.917,49.74 16.404,49.844 22.038,44.185 23.563,50.161 23.646,50.208 29.583,48.542 27.5,56.25 33.333,66.146 39.167,56.25 37.083,48.542 43.021,50.208 43.104,50.161 44.629,44.185 50.263,49.844 61.75,49.74 56.096,39.74 48.379,37.69 ; 16.404,16.823 22.038,22.481 23.563,16.506 23.646,16.458 29.583,18.125 27.5,10.417 33.333,0.521 39.167,10.417 37.083,18.125 43.021,16.458 43.104,16.506 44.629,22.481 50.263,16.823 61.75,16.927 56.096,26.927 48.379,28.977
  lines w0.104: 48.379,28.977 56.096,26.927 61.75,16.927 50.263,16.823 44.629,22.481 43.104,16.506 43.021,16.458 37.083,18.125 39.167,10.417 33.333,0.521 27.5,10.417 29.583,18.125 23.646,16.458 23.563,16.506 22.038,22.481 16.404,16.823 4.917,16.927 10.57,26.927 18.288,28.977 13.875,33.286 13.875,33.381 18.288,37.69 10.57,39.74 4.917,49.74 16.404,49.844 22.038,44.185 23.563,50.161 23.646,50.208 29.583,48.542 27.5,56.25 33.333,66.146 39.167,56.25 37.083,48.542 43.021,50.208 43.104,50.161 44.629,44.185 50.263,49.844 61.75,49.74 56.096,39.74 48.379,37.69

## Text inside footprints (layer, text, board x,y; h text height)
*: Bottom Overlay "12mm" at 32.538,38.229 h1.5 r270; Bottom Overlay "-" at 41.936,37.34 h1.5 r270; Bottom Overlay "+" at 23.521,37.34 h1.5 r270